# EAGLE board CONTROLBOARD-2.1 (EAGLE 7.6.0)
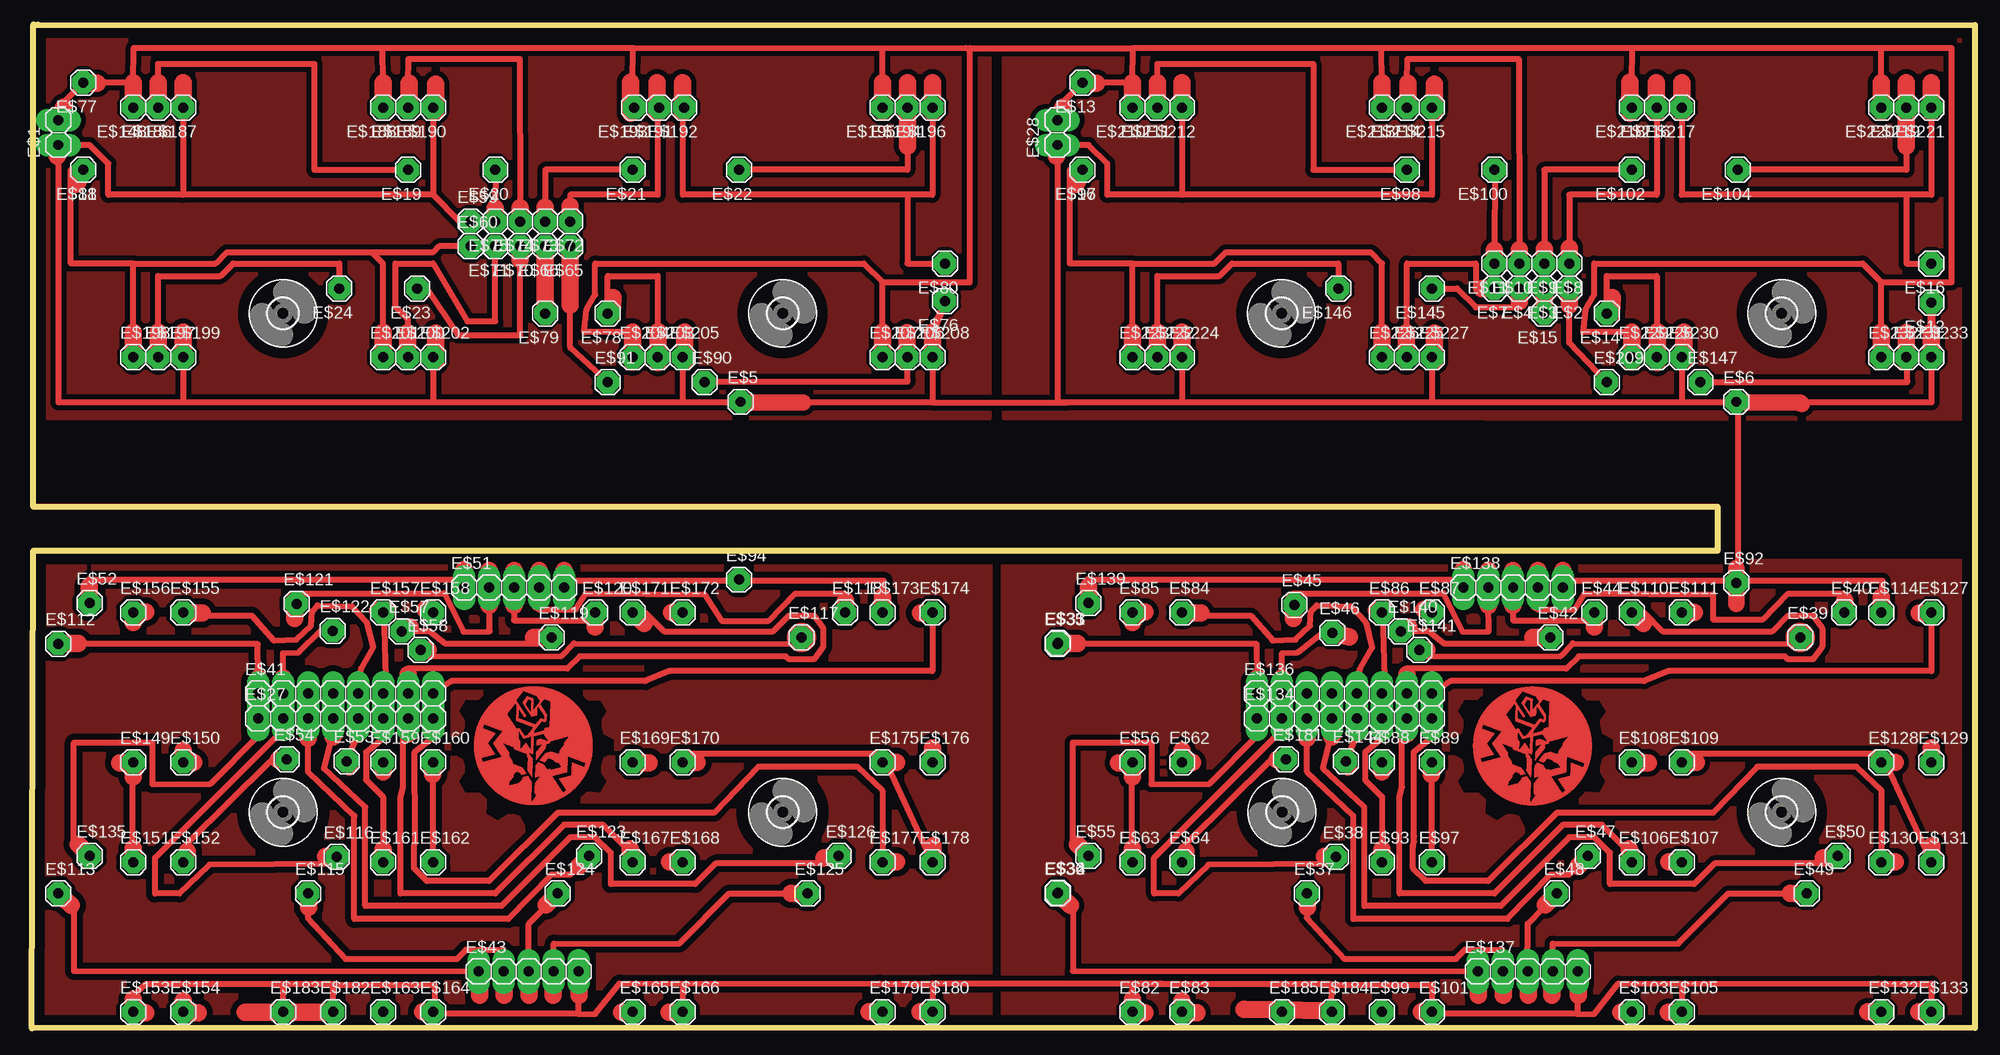
[diagram p0: board, top side]
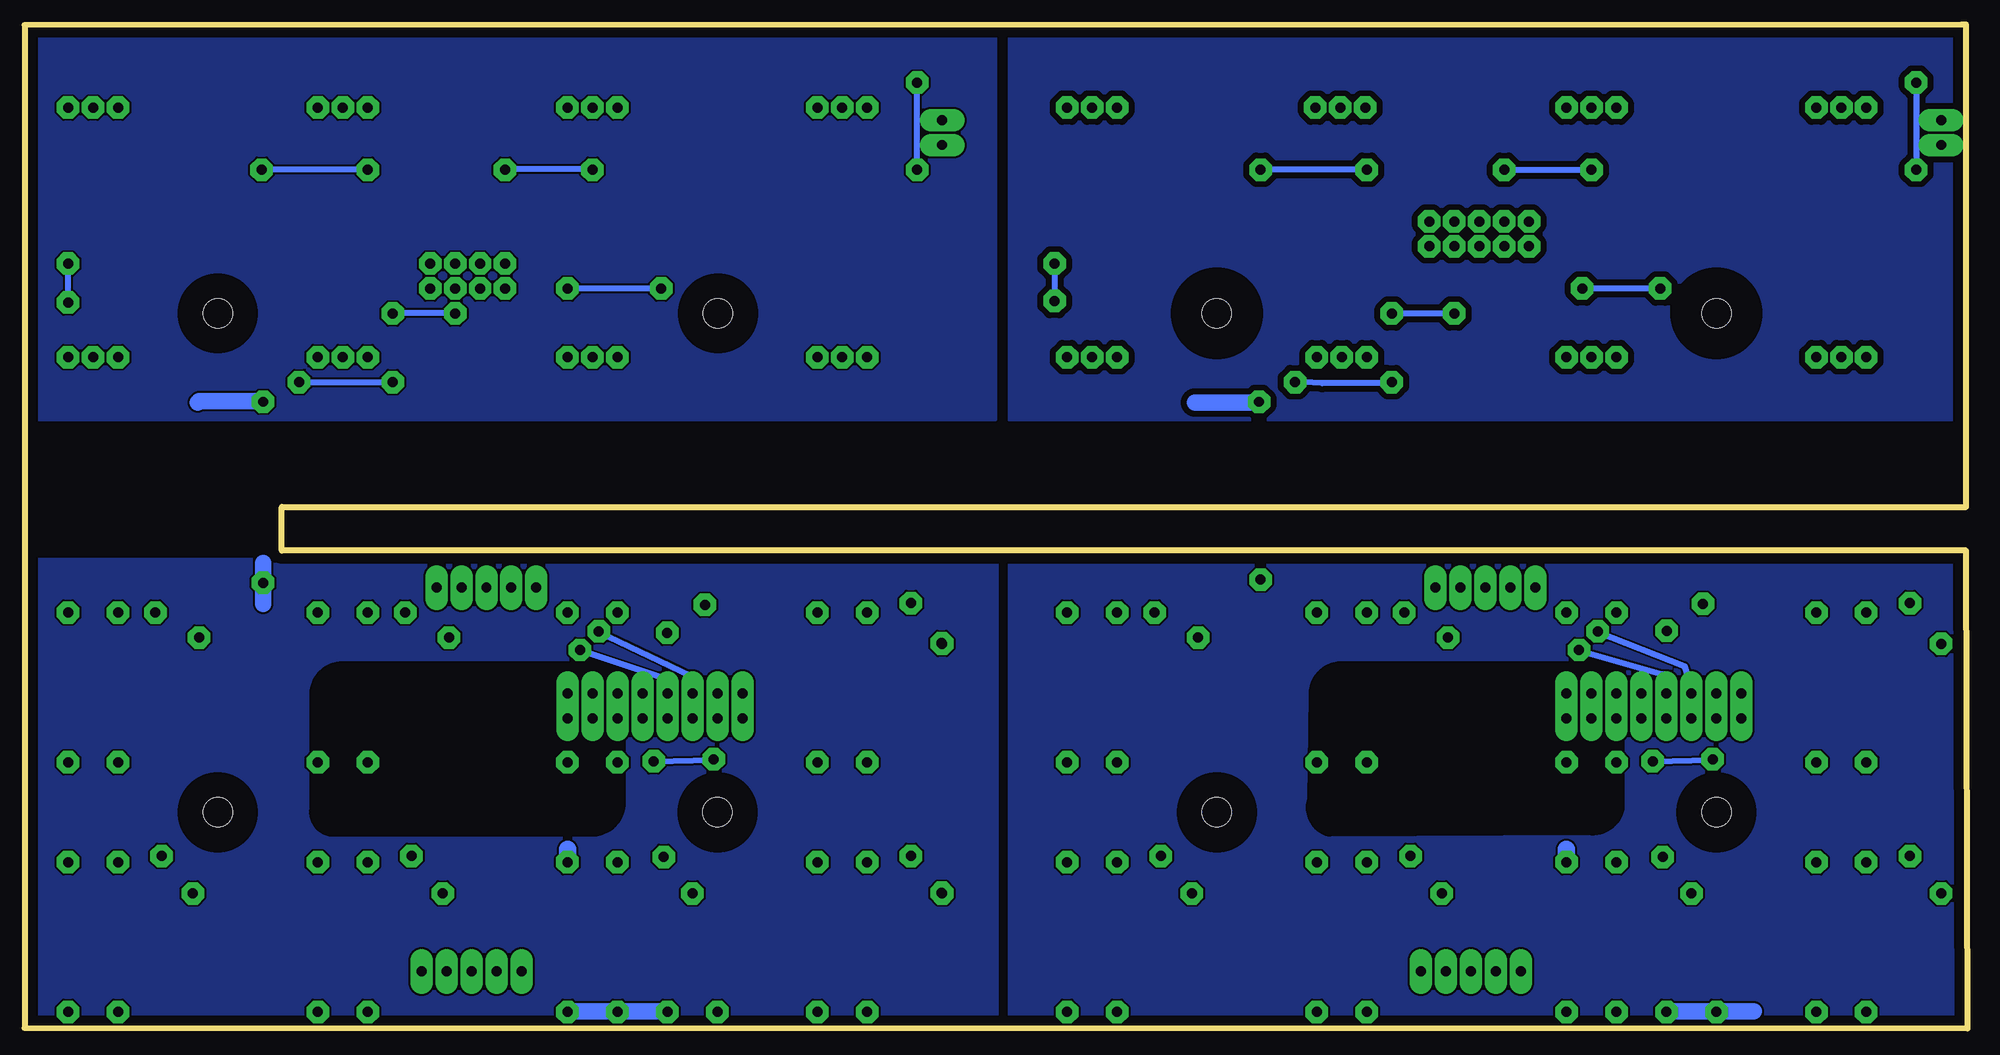
[diagram p1: board, bottom side, seen from below]

Size 197.61 x 102.11 mm. Coordinates in mm from the lower left corner, seen from the top.
Outline: 0.64,102.11 197.61,102.06 197.61,0.05 0,0 0.15,48.59 171.44,48.59 171.44,53.04 0.15,53.04 0.15,102.11 0.64,102.11
Copper layers (1*16): Top 0.035mm / dielectric 1.5mm / Bottom 0.035mm
Design rules "default *": minimum track width 10mil, minimum drill 40mil, track to track 8mil, track to pad 8mil, pad to pad 8mil, via to via 8mil, smd to smd 8mil, copper to edge 40mil, drill to drill 8mil, minimum pad ring 25mil, minimum via ring 8mil, stop-mask expansion 4mil, vias tented up to drill 0mil, thermal gap 10mil

## Footprints (pad centres in the part's own frame; a part is rotated, then mirrored left to right if it is on the bottom)
1X02 = drill 1.016 long: 1 -1.27,0; 2 1.27,0
1X01 = drill 1.016 octagon: 1 0,0
3,0 = hole 3: 0,0
1X08 = drill 1.016 long: 1 -8.89,0; 2 -6.35,0; 3 -3.81,0; 4 -1.27,0; 5 1.27,0; 6 3.81,0; 7 6.35,0; 8 8.89,0
1X05 = drill 1.016 long: 1 -5.08,0; 2 -2.54,0; 3 0,0; 4 2.54,0; 5 5.08,0

## Placement (x,y rotation side)
E$1  [1X02]  2.69,91.14 90 top
E$2  [1X01]  156.36,75.26 180 top
E$3  [1X01]  153.82,75.26 180 top
E$4  [1X01]  151.28,75.26 180 top
E$5  [1X01]  72.07,63.74 0 top
E$6  [1X01]  173.35,63.74 0 top
E$7  [1X01]  148.74,75.26 180 top
E$8  [1X01]  156.36,77.8 180 top
E$9  [1X01]  153.82,77.8 180 top
E$10  [1X01]  151.28,77.8 180 top
E$11  [1X01]  148.74,77.8 180 top
E$12  [1X01]  193.19,73.83 180 top
E$13  [1X01]  106.83,96.22 180 top
E$14  [1X01]  160.17,72.72 180 top
E$15  [1X01]  153.82,72.72 180 top
E$16  [1X01]  193.19,77.8 180 top
E$17  [1X01]  106.83,87.33 180 top
E$18  [1X01]  5.23,87.33 180 top
E$19  [1X01]  38.25,87.33 180 top
E$20  [1X01]  47.14,87.33 180 top
E$21  [1X01]  61.11,87.33 180 top
E$22  [1X01]  71.91,87.33 180 top
E$23  [1X01]  39.2,75.26 180 top
E$24  [1X01]  31.27,75.26 180 top
E$25  [3,0]  127.15,21.98 0 top
E$26  [3,0]  177.95,21.98 0 top
E$27  [1X08]  31.9,31.51 0 top
E$28  [1X02]  104.29,91.14 90 top
E$29  [3,0]  25.55,72.73 0 top
E$30  [3,0]  76.35,72.73 0 top
E$31  [1X01]  104.34,39.19 0 top
E$32  [1X01]  104.34,13.79 0 top
E$33  [1X01]  104.34,39.18 0 top
E$34  [1X01]  104.34,13.78 0 top
E$35  [1X01]  104.29,39.13 0 top
E$36  [1X01]  104.29,13.73 0 top
E$37  [1X01]  129.69,13.73 0 top
E$38  [1X01]  132.61,17.44 0 top
E$39  [1X01]  179.86,39.76 0 top
E$40  [1X01]  184.3,42.3 0 top
E$41  [1X08]  31.9,34.05 0 top
E$42  [1X01]  154.46,39.76 0 top
E$43  [1X05]  50.53,5.79 0 top
E$44  [1X01]  158.9,42.3 0 top
E$45  [1X01]  128.42,43.09 0 top
E$46  [1X01]  132.26,40.25 0 top
E$47  [1X01]  158.27,17.54 0 top
E$48  [1X01]  155.09,13.73 0 top
E$49  [1X01]  180.49,13.73 0 top
E$50  [1X01]  183.67,17.54 0 top
E$51  [1X05]  49.05,44.84 0 top
E$52  [1X01]  5.87,43.26 0 top
E$53  [1X01]  32.03,27.18 0 top
E$54  [1X01]  25.93,27.38 0 top
E$55  [1X01]  107.47,17.54 0 top
E$56  [1X01]  111.91,27.06 0 top
E$57  [1X01]  37.62,40.4 0 top
E$58  [1X01]  39.52,38.49 0 top
E$59  [1X01]  44.6,82.09 0 top
E$60  [1X01]  44.6,79.55 0 top
E$61  [3,0]  25.55,21.98 0 top
E$62  [1X01]  116.99,27.06 0 top
E$63  [1X01]  111.91,16.9 0 top
E$64  [1X01]  116.99,16.9 0 top
E$65  [1X01]  54.76,79.55 180 top
E$66  [1X01]  52.22,79.55 180 top
E$67  [3,0]  76.35,21.98 0 top
E$68  [3,0]  127.1,72.73 0 top
E$69  [3,0]  177.95,72.73 0 top
E$70  [1X01]  49.68,79.55 180 top
E$71  [1X01]  47.14,79.55 180 top
E$72  [1X01]  54.76,82.09 180 top
E$73  [1X01]  52.22,82.09 180 top
E$74  [1X01]  49.68,82.09 180 top
E$75  [1X01]  47.14,82.09 180 top
E$76  [1X01]  92.86,73.99 180 top
E$77  [1X01]  5.23,96.22 180 top
E$78  [1X01]  58.57,72.72 180 top
E$79  [1X01]  52.22,72.72 180 top
E$80  [1X01]  92.86,77.8 180 top
E$81  [1X01]  5.23,87.33 180 top
E$82  [1X01]  111.91,1.66 0 top
E$83  [1X01]  116.99,1.66 0 top
E$84  [1X01]  116.99,42.3 0 top
E$85  [1X01]  111.91,42.3 0 top
E$86  [1X01]  137.31,42.3 0 top
E$87  [1X01]  142.39,42.3 0 top
E$88  [1X01]  137.31,27.06 0 top
E$89  [1X01]  142.39,27.06 0 top
E$90  [1X01]  68.41,65.74 0 top
E$91  [1X01]  58.57,65.74 0 top
E$92  [1X01]  173.35,45.32 0 top
E$93  [1X01]  137.31,16.9 0 top
E$94  [1X01]  71.91,45.64 0 top
E$96  [1X01]  106.83,87.33 180 top
E$97  [1X01]  142.39,16.9 0 top
E$98  [1X01]  139.85,87.33 180 top
E$99  [1X01]  137.31,1.66 0 top
E$100  [1X01]  148.74,87.33 180 top
E$101  [1X01]  142.39,1.66 0 top
E$102  [1X01]  162.71,87.33 180 top
E$103  [1X01]  162.71,1.66 0 top
E$104  [1X01]  173.51,87.33 180 top
E$105  [1X01]  167.79,1.66 0 top
E$106  [1X01]  162.71,16.9 0 top
E$107  [1X01]  167.79,16.9 0 top
E$108  [1X01]  162.71,27.06 0 top
E$109  [1X01]  167.79,27.06 0 top
E$110  [1X01]  162.71,42.3 0 top
E$111  [1X01]  167.79,42.3 0 top
E$112  [1X01]  2.69,39.13 0 top
E$113  [1X01]  2.69,13.73 0 top
E$114  [1X01]  188.11,42.3 0 top
E$115  [1X01]  28.09,13.73 0 top
E$116  [1X01]  31.01,17.44 0 top
E$117  [1X01]  78.26,39.76 0 top
E$118  [1X01]  82.7,42.3 0 top
E$119  [1X01]  52.86,39.76 0 top
E$120  [1X01]  57.3,42.3 0 top
E$121  [1X01]  26.92,43.19 0 top
E$122  [1X01]  30.61,40.45 0 top
E$123  [1X01]  56.67,17.54 0 top
E$124  [1X01]  53.49,13.73 0 top
E$125  [1X01]  78.89,13.73 0 top
E$126  [1X01]  82.07,17.54 0 top
E$127  [1X01]  193.19,42.3 0 top
E$128  [1X01]  188.11,27.06 0 top
E$129  [1X01]  193.19,27.06 0 top
E$130  [1X01]  188.11,16.9 0 top
E$131  [1X01]  193.19,16.9 0 top
E$132  [1X01]  188.11,1.66 0 top
E$133  [1X01]  193.19,1.66 0 top
E$134  [1X08]  133.5,31.51 0 top
E$135  [1X01]  5.87,17.54 0 top
E$136  [1X08]  133.5,34.05 0 top
E$137  [1X05]  152.13,5.79 0 top
E$138  [1X05]  150.65,44.84 0 top
E$139  [1X01]  107.47,43.26 0 top
E$140  [1X01]  139.22,40.4 0 top
E$141  [1X01]  141.12,38.49 0 top
E$144  [1X01]  133.63,27.18 0 top
E$145  [1X01]  142.39,75.26 180 top
E$146  [1X01]  132.87,75.26 180 top
E$147  [1X01]  169.7,65.74 0 top
E$148  [1X01]  10.31,93.68 180 top
E$149  [1X01]  10.31,27.06 0 top
E$150  [1X01]  15.39,27.06 0 top  (not fitted)
E$151  [1X01]  10.31,16.9 0 top
E$152  [1X01]  15.39,16.9 0 top
E$153  [1X01]  10.31,1.66 0 top
E$154  [1X01]  15.39,1.66 0 top
E$155  [1X01]  15.39,42.3 0 top
E$156  [1X01]  10.31,42.3 0 top
E$157  [1X01]  35.71,42.3 0 top
E$158  [1X01]  40.79,42.3 0 top
E$159  [1X01]  35.71,27.06 0 top
E$160  [1X01]  40.79,27.06 0 top
E$161  [1X01]  35.71,16.9 0 top
E$162  [1X01]  40.79,16.9 0 top
E$163  [1X01]  35.71,1.66 0 top
E$164  [1X01]  40.79,1.66 0 top
E$165  [1X01]  61.11,1.66 0 top
E$166  [1X01]  66.19,1.66 0 top
E$167  [1X01]  61.11,16.9 0 top
E$168  [1X01]  66.19,16.9 0 top
E$169  [1X01]  61.11,27.06 0 top
E$170  [1X01]  66.19,27.06 0 top
E$171  [1X01]  61.11,42.3 0 top
E$172  [1X01]  66.19,42.3 0 top
E$173  [1X01]  86.51,42.3 0 top
E$174  [1X01]  91.59,42.3 0 top
E$175  [1X01]  86.51,27.06 0 top
E$176  [1X01]  91.59,27.06 0 top
E$177  [1X01]  86.51,16.9 0 top
E$178  [1X01]  91.59,16.9 0 top
E$179  [1X01]  86.51,1.66 0 top
E$180  [1X01]  91.59,1.66 0 top
E$181  [1X01]  127.53,27.38 0 top
E$182  [1X01]  30.63,1.66 0 top
E$183  [1X01]  25.55,1.66 0 top
E$184  [1X01]  132.23,1.66 0 top
E$185  [1X01]  127.15,1.66 0 top
E$186  [1X01]  12.85,93.68 180 top
E$187  [1X01]  15.39,93.68 180 top
E$188  [1X01]  35.71,93.68 180 top
E$189  [1X01]  38.25,93.68 180 top
E$190  [1X01]  40.79,93.68 180 top
E$191  [1X01]  63.81,93.68 180 top
E$192  [1X01]  66.35,93.68 180 top
E$193  [1X01]  61.27,93.68 180 top
E$194  [1X01]  89.05,93.68 180 top
E$195  [1X01]  86.51,93.68 180 top
E$196  [1X01]  91.59,93.68 180 top
E$197  [1X01]  12.85,68.28 0 top
E$198  [1X01]  10.31,68.28 0 top
E$199  [1X01]  15.39,68.28 0 top
E$200  [1X01]  38.25,68.28 0 top
E$201  [1X01]  35.71,68.28 0 top
E$202  [1X01]  40.79,68.28 0 top
E$203  [1X01]  63.65,68.28 0 top
E$204  [1X01]  61.11,68.28 0 top
E$205  [1X01]  66.19,68.28 0 top
E$206  [1X01]  89.05,68.28 0 top
E$207  [1X01]  86.51,68.28 0 top
E$208  [1X01]  91.59,68.28 0 top
E$209  [1X01]  160.17,65.74 0 top
E$210  [1X01]  111.91,93.68 180 top
E$211  [1X01]  114.45,93.68 180 top
E$212  [1X01]  116.99,93.68 180 top
E$213  [1X01]  137.31,93.68 180 top
E$214  [1X01]  139.85,93.68 180 top
E$215  [1X01]  142.39,93.68 180 top
E$216  [1X01]  165.25,93.68 180 top
E$217  [1X01]  167.79,93.68 180 top
E$218  [1X01]  162.71,93.68 180 top
E$219  [1X01]  190.65,93.68 180 top
E$220  [1X01]  188.11,93.68 180 top
E$221  [1X01]  193.19,93.68 180 top
E$222  [1X01]  114.45,68.28 0 top
E$223  [1X01]  111.91,68.28 0 top
E$224  [1X01]  116.99,68.28 0 top
E$225  [1X01]  139.85,68.28 0 top
E$226  [1X01]  137.31,68.28 0 top
E$227  [1X01]  142.39,68.28 0 top
E$228  [1X01]  165.25,68.28 0 top
E$229  [1X01]  162.71,68.28 0 top
E$230  [1X01]  167.79,68.28 0 top
E$231  [1X01]  190.65,68.28 0 top
E$232  [1X01]  188.11,68.28 0 top
E$233  [1X01]  193.19,68.28 0 top

## Library data of the parts
E$1-E$24 E$27 E$28 E$31-E$60 E$62-E$66 E$70-E$94 E$96-E$141 E$144-E$233 = pinhead
E$25 E$26 E$29 E$30 E$61 E$67-E$69 = holes

## Nets
S$9: E$54.1
S$15: E$136.8
S$16: E$110.1 E$136.7
S$17: E$130.1 E$134.8
S$19: E$64.1
S$25: E$41.8
S$26: E$41.7 E$171.1
S$27: E$27.8 E$177.1
S$28: E$152.1
S$30: E$41.5
S$36: E$161.1
S$37: E$27.2 E$116.1
S$38: E$166.1
S$39: E$27.7 E$167.1
S$40: E$123.1
S$41: E$71.1
S$42: E$60.1 E$81.1
S$43: E$57.1 E$119.1
S$45: E$52.1
S$46: E$135.1
S$47: E$113.1
S$48: E$1.2 E$77.1
S$55: E$72.1
S$57: E$74.1
S$58: E$78.1
S$60: E$13.1 E$28.2
S$61: E$2.1
S$63: E$4.1
S$65: E$7.1
S$66: E$12.1
S$76: E$136.5
S$82: E$93.1
S$83: E$38.1 E$134.2
S$84: E$105.1
S$85: E$106.1 E$134.7
S$86: E$47.1
S$90: E$9.1
S$91: E$42.1 E$140.1
S$93: E$139.1
S$94: E$55.1
S$95: E$36.1
S$101: E$8.1
S$102: E$11.1
S$110: E$10.1
S$167: E$76.1
S$168: E$14.1
S$237: E$53.1
S$244: E$209.1
S$280: E$80.1
S$281: E$75.1
S$283: E$73.1
S$285: E$70.1
S$287: E$65.1
S$288: E$91.1
S$289: E$66.1 E$79.1
S$293: E$17.1
S$295: E$16.1
S$296: E$3.1 E$15.1
S$298: E$181.1
S$299: E$144.1

## Tracks (layer width: path | path; a pad name or v marks a point on that pad's centre or on a via)
S$1
  Top 1.778: 46.51,43 46.51,46.56
S$2
  Top 0.61: 5.79,45.68 43.95,45.68 43.95,45.62
S$3
  Top 0.61: 26.88,44.22 41.97,44.22 41.97,44.25 43.89,40.35 46.57,40.38 46.54,43.15
S$4
  Top 0.61: 33.17,30.02 33.17,31.51
  Top 1.778: 33.12,31.5 33.17,30.02
S$5
  Top 0.61: 32.79,21.64 28.09,26.11 28.09,28.78
S$6
  Bottom 0.61: 37.62,40.34 28.8,36.86 28.09,34.62
S$7
  Bottom 0.61: 39.52,38.46 30.99,36.02 30.73,34.39
S$8
  Top 0.61: 28.09,31.57 28.09,31.5
  Top 1.778: 28.09,31.5 28.09,29.52
S$9
  Top 0.61: E$54.1 24.28,27.13
S$10
  Bottom 0.61: 32.06,27.16 26.03,27.32
S$11
  Top 0.813: 183.67,17.54 183.67,16.9
S$12
  Top 0.61: 55.78,1.47 41.05,1.47
S$13
  Top 1.778: 45.52,5.79 45.52,3.38
S$14
  Top 1.778: 50.6,5.79 50.6,3.38
S$15
  Top 0.61: 193.19,41.99 193.19,36.33 166.47,36.33 163.98,35.32 144.3,35.32 E$136.8
S$16
  Top 0.61: E$110.1 163.98,42.3 165.89,40.4 177,40.4 178.59,41.99 181.13,41.99 182.08,40.72 182.08,38.81 181.13,37.54 178.59,37.54 178.27,37.86 157.31,37.86 156.05,36.59 139.85,36.59 139.85,36.02 E$136.7
  Top 1.778: E$136.7 139.85,36.02
S$17
  Top 0.61: 142.39,30.99 142.39,29.6 140.55,28.12 140.56,19.53 140.56,18.97 140.46,18.49 140.46,16.29 141.76,15 148.11,15 155.14,21.97 171.01,21.97 175.48,26.62 185.57,26.62 188.11,24.21 E$130.1 | E$134.8
  Top 1.778: E$134.8 142.39,30.99 | E$130.1 189.53,16.92
S$18
  Top 0.61: 134.77,30.02 134.77,31.51
  Top 1.778: 134.72,31.5 134.77,30.02
S$19
  Top 0.61: E$64.1 116.99,18.36 117.63,19 125.76,27.06
S$20
  Top 1.778: 142.39,16.87 142.39,16.9
S$21
  Top 1.778: 142.65,70.71 142.65,67.89
S$22
  Top 1.778: 139.81,70.76 139.81,67.89
S$23
  Top 0.813: 82.07,17.54 82.07,16.9
S$24
  Top 1.778: 165.32,70.87 165.32,67.74
S$25
  Top 0.61: 91.59,41.99 91.59,36.33 64.87,36.33 62.38,35.32 42.7,35.32 E$41.8
S$26
  Top 0.61: E$171.1 62.38,42.3 64.29,40.4 75.4,40.4 76.99,41.99 79.53,41.99 80.48,40.72 80.48,38.81 79.53,37.54 76.99,37.54 76.67,37.86 55.72,37.86 54.44,36.59 38.25,36.59 38.25,36.02 E$41.7
  Top 1.778: E$41.7 38.25,36.02
S$27
  Top 0.61: 40.79,30.99 40.79,29.6 38.95,28.12 38.96,19.53 38.96,18.97 38.86,18.49 38.86,16.29 40.16,15 46.51,15 53.54,21.97 69.41,21.97 73.88,26.62 83.97,26.62 86.51,24.21 E$177.1 | E$27.8
  Top 1.778: E$27.8 40.79,30.99 | E$177.1 87.93,16.92
S$28
  Top 0.61: E$152.1 15.39,18.36 16.03,19 24.16,27.06
S$29
  Top 0.61: 40.79,17.49 40.79,27.38
S$30
  Top 0.61: E$41.5 33.49,36.59
S$31
  Top 0.61: 86.19,4.55 91.59,4.55 91.59,1.98
S$32
  Top 0.61: 40.86,1.98 40.86,1.95
S$33
  Top 0.61: 33.49,36.59 34.7,38.75 34.06,41.29 32.54,42.94 29.05,43.04 29.05,42.96 28.5,42.42 28.4,40.95 26.92,39.55 24.6,39.45 22.38,41.99 15.39,41.99
S$34
  Top 0.406: 41.11,42.62 41.11,41.67
S$35
  Top 0.61: 35.78,42.3 36.03,34.05
S$36
  Top 0.61: 35.71,31.51 35.67,29.46 33.99,28.09 34,25.29 35.71,23.57 35.71,18.19 E$161.1
  Top 1.778: 35.76,16.92 35.71,18.19
S$37
  Top 0.61: E$116.1 31.27,16.71 18.06,16.65 15.01,13.73 12.53,13.73 12.53,17.35 25.55,30.37 25.55,30.43 | E$27.2
  Top 1.778: E$27.2 25.55,30.43
S$38
  Top 0.61: 66.19,4.5 E$166.1
S$39
  Top 0.61: E$167.1 60.93,17.86 58.08,20.71 54.13,20.71 47.14,13.73 37.5,13.73 37.5,23.57 37.74,24.52 37.74,29.54 38.25,29.97 | E$27.7
  Top 1.778: E$27.7 38.25,29.97
S$40
  Top 0.61: E$123.1 54.76,15.63 52.86,15.63 48.47,11.13 32.8,11.14 32.8,21.56
S$41
  Top 0.61: 44.28,71.93 47.14,71.93 E$71.1
S$42
  Top 0.61: E$60.1 41.43,79.55 40.79,78.91 34.6,78.91 | E$81.1 3.96,87.33 3.96,77.8 10.31,77.8 | 10.31,70.82 10.31,77.8 | 35.71,70.82 35.71,77.8 34.6,78.91 | 34.6,78.91 34.57,78.94 19.84,78.94 18.69,77.8 10.31,77.8
  Top 1.778: 35.71,70.82 35.71,67.95 | 10.31,70.82 10.31,67.89
S$43
  Top 0.61: E$57.1 40.47,40.4 42.06,39.13 51.27,39.13 E$119.1
S$44
  Top 0.61: 82.07,16.78 69.56,16.78 67.46,14.68 58.89,14.68 58.89,17.86 57.3,19.44 54.76,19.44 47.78,12.46 33.92,12.46 33.92,22.53
S$45
  Top 0.406: 5.87,45.16 E$52.1
S$46
  Top 0.61: 4.28,19.13 E$135.1
S$47
  Top 0.61: 4.28,12.14 E$113.1
S$48
  Top 0.61: 86.51,75.9 84.61,77.8 57.3,77.8 57.3,74.63 56.44,73.15 56.18,70.82 61.11,70.82 | 86.51,75.9 95.4,75.9 95.4,99.75 86.51,99.7 | 86.51,70.82 86.51,75.9 | 35.66,99.75 10.36,99.75 10.31,96.22 E$77.1 2.69,93.68 2.69,92.51 E$1.2 | 35.66,99.75 61.16,99.75 | 61.16,99.75 86.51,99.7 | 86.51,96.22 86.51,99.7 | 61.11,96.22 61.16,99.75 | 35.71,96.22 35.66,99.75
  Top 1.778: 86.51,96.22 86.51,93.24 | 35.71,96.22 35.71,93.45 | 10.31,96.22 10.31,93.75 | 86.51,70.82 86.51,67.84 | 61.11,70.82 61.11,67.79 | 2.69,92.51 3.25,93.73
S$49
  Top 0.61: 89.05,65.75 68.41,65.75
S$50
  Top 0.61: 12.85,70.82 12.85,76.53 19.2,76.53 20.47,77.8 31.27,77.8 31.27,75.36
  Top 1.778: 12.85,70.82 12.85,67.89
S$51
  Top 0.61: 38.25,70.82 38.25,72.09 36.98,73.36 36.98,77.8 40.79,77.8 44.28,71.93
S$52
  Top 1.778: 168,70.82 168,67.84
S$53
  Top 0.406: 40.79,96.22 40.79,94.31
  Top 0.61: 40.79,84.79 15.39,84.79 | 15.39,84.79 7.77,84.79 7.77,87.96 5.87,89.87 2.69,89.87 2.69,63.68 | 40.79,94.31 40.79,84.79 | 15.39,93.8 15.39,84.79 | 44.44,82.09 43.49,82.09 40.79,84.79
  Top 1.778: 15.39,96.22 15.39,93.8
S$54
  Top 0.61: 89.05,89.74 89.05,87.33 71.91,87.33
  Top 1.778: 89.05,96.22 89.05,89.74
S$55
  Top 0.406: 63.65,96.22 63.65,94.31
  Top 0.61: 63.65,94.31 63.65,84.79 54.76,84.79 54.76,83.64 E$72.1
  Top 1.778: 54.76,82.06 54.76,83.64
S$56
  Top 0.61: 12.85,96.22 12.85,98.12 28.73,98.12 28.73,87.33 38.25,87.33
  Top 1.778: 12.85,96.22 12.85,93.8
S$57
  Top 0.61: 38.25,96.22 38.3,98.63 49.63,98.63 49.68,83.48 E$74.1
  Top 1.778: 49.68,82.06 49.68,83.48
S$58
  Top 0.61: E$78.1 58.57,76.53 63.65,76.53 63.65,70.82
S$59
  pour Top (isolate 0.508): 97.31,62.13 0.79,62.13 0.73,101.38 97.31,101.3
S$60
  Top 0.61: 188.11,75.9 186.21,77.8 158.9,77.8 158.9,74.63 158.04,73.15 157.78,70.82 162.71,70.82 | 188.11,75.9 195.26,75.9 195.26,99.74 188.11,99.75 | 188.11,70.82 188.11,75.9 | 137.26,99.75 111.96,99.75 111.91,96.22 E$13.1 104.29,93.68 104.29,92.51 E$28.2 | 137.26,99.75 162.76,99.75 | 162.76,99.75 188.11,99.75 | 188.11,96.22 188.11,99.75 | 162.71,96.22 162.76,99.75 | 137.31,96.22 137.26,99.75
  Top 1.778: 188.11,96.22 188.11,93.24 | 137.31,96.22 137.31,93.45 | 111.91,96.22 111.91,93.75 | 188.11,70.82 188.11,67.84 | 162.71,70.82 162.71,67.79 | 104.29,92.51 104.85,93.73
S$61
  Top 0.61: 156.36,75.18 E$2.1 | 156.36,69.84 156.36,73.56
  Top 1.778: 156.36,75.18 156.36,73.56
S$62
  Top 0.61: 190.68,65.72 169.73,65.72
S$63
  Top 0.61: E$4.1 151.28,73.91 151.28,73.36 146.84,73.36 144.93,75.26 142.39,75.26
  Top 1.778: 151.28,75.34 151.28,73.91
S$64
  Top 0.61: 114.45,70.82 114.45,76.53 120.8,76.53 122.07,77.8 132.87,77.8 132.87,75.36
  Top 1.778: 114.45,70.82 114.45,67.89
S$65
  Top 0.61: 139.85,70.82 139.85,77.8 146.84,77.8 146.84,75.26 E$7.1
S$66
  Top 0.406: 167.79,70.82 167.79,68.91
  Top 0.61: 193.19,67.89 193.19,63.68 167.79,63.68 | 167.79,63.68 142.39,63.68 | 142.39,63.68 116.99,63.68 | 116.99,63.68 104.36,63.68 | 167.79,68.91 167.79,63.68 | 142.39,68.91 142.39,63.68 | 116.99,67.95 116.99,63.68
  Top 0.813: E$12.1 193.19,70.82
  Top 1.778: 193.19,70.82 193.19,67.89 | 116.99,70.82 116.99,67.95
S$67
  pour Top (isolate 0.61): 0.79,47.29 97.31,47.29 97.31,1.03 0.79,0.88
S$68
  Bottom 1.778: 142.39,16.9 142.39,18.19
S$69
  Top 1.778: 162.51,96.27 162.51,93.09
S$70
  Top 1.27: 91.59,96.22 91.59,94.31
S$71
  Top 1.778: 165.19,96.22 165.19,93.09
S$72
  Top 1.778: 139.97,96.16 139.97,93.45
S$73
  Top 1.778: 142.65,96.06 142.65,93.35
S$74
  pour Top (isolate 0.508): 98.96,47.38 196.37,47.38 196.79,0.87 98.96,1.03
S$75
  Top 0.61: 142.39,17.49 142.39,27.38
S$76
  Top 0.61: E$136.5 135.09,36.59
S$77
  Top 0.61: 187.8,4.55 193.19,4.55 193.19,1.98
S$78
  Bottom 1.676: 132.23,1.76 142.39,1.76
S$79
  Top 0.61: 135.09,36.59 136.3,38.75 135.66,41.29 134.14,42.94 130.64,43.04 130.64,42.96 130.1,42.42 130,40.95 128.52,39.55 126.2,39.45 123.98,41.99 116.99,41.99
S$80
  Top 0.406: 142.71,42.62 142.71,41.67
S$81
  Top 0.61: 137.38,42.3 137.63,34.05
S$82
  Top 0.61: 137.31,31.51 137.27,29.46 135.59,28.09 135.6,25.29 137.31,23.57 137.31,18.19 E$93.1
  Top 1.778: 137.36,16.92 137.31,18.19
S$83
  Top 0.61: E$38.1 132.87,16.71 119.66,16.65 116.61,13.73 114.13,13.73 114.13,17.35 127.15,30.37 127.15,30.43 | E$134.2
  Top 1.778: E$134.2 127.15,30.43
S$84
  Top 0.61: 167.79,4.5 E$105.1
S$85
  Top 0.61: E$106.1 162.53,17.86 159.68,20.71 155.73,20.71 148.74,13.73 139.1,13.73 139.1,23.57 139.34,24.52 139.34,29.54 139.85,29.97 | E$134.7
  Top 1.778: E$134.7 139.85,29.97
S$86
  Top 0.61: E$47.1 156.36,15.63 154.46,15.63 150.07,11.13 134.4,11.14 134.4,21.56
S$87
  Top 0.61: 30.63,4.46 40.95,4.46 40.95,1.76 40.63,1.44
S$88
  Top 0.61: 131.92,4.46 142.39,4.46 142.39,1.6
S$89
  Top 0.406: 142.39,96.22 142.39,94.31
  Top 0.61: 116.99,84.79 142.39,84.79 142.39,94.31 | 116.99,84.79 109.37,84.79 109.37,87.96 107.47,89.87 104.29,89.87 104.29,63.68 | 116.99,93.8 116.99,84.79
  Top 1.778: 116.99,96.22 116.99,93.8
S$90
  Top 0.61: 162.71,87.33 153.82,87.33 153.82,79.25 E$9.1
  Top 1.778: 153.82,77.78 153.82,79.25
S$91
  Top 0.61: E$140.1 142.07,40.4 143.66,39.13 152.87,39.13 E$42.1
S$92
  Top 0.61: 183.67,16.78 171.16,16.78 169.06,14.68 160.49,14.68 160.49,17.86 158.9,19.44 156.36,19.44 149.38,12.46 135.52,12.46 135.52,22.53
S$93
  Top 0.406: 107.47,45.16 E$139.1
S$94
  Top 0.61: 105.88,19.13 E$55.1
S$95
  Top 0.61: 105.88,12.14 E$36.1
S$96
  Top 0.61: 172.87,63.83 173.51,63.83 173.51,45.42
S$97
  Top 0.61: 25.54,35.8 25.54,38.18 27.16,38.24 29.41,40.47 31.3,40.47
S$98
  Top 0.61: 23.04,35.74 22.98,39.1 2.99,39.13
S$99
  Top 1.778: 155.73,44.27 155.73,46.56
S$100
  Top 0.61: 190.65,89.74 190.65,87.33 173.51,87.33
  Top 1.778: 190.65,96.22 190.65,89.74
S$101
  Top 0.406: 165.25,96.22 165.25,94.31
  Top 0.61: 165.25,94.31 165.25,84.79 156.36,84.79 156.36,79.35 E$8.1
  Top 1.778: 156.36,77.78 156.36,79.35
S$102
  Top 0.61: 148.74,77.88 E$11.1 | 148.79,87.35 148.74,79.15
  Top 1.778: 148.74,77.88 148.74,79.15
S$103
  Top 0.61: 114.45,96.22 114.45,98.12 130.33,98.12 130.33,87.33 139.85,87.33
  Top 1.778: 114.45,96.22 114.45,93.8
S$104
  Top 1.778: 51.59,43.26 51.59,46.56
S$105
  Top 1.778: 49.05,43 49.05,46.56
S$106
  Top 1.778: 43.97,44.09 43.97,46.69
S$107
  Top 1.778: 54.13,44.27 54.13,46.56
S$108
  Top 1.676: 173.35,63.67 179.86,63.67 180.02,63.51
S$109
  Top 1.676: 72.07,63.67 78.42,63.67
S$110
  Top 0.61: 139.85,96.22 139.9,98.63 151.23,98.63 151.28,79.2 E$10.1
  Top 1.778: 151.28,77.78 151.28,79.2
S$111
  Top 1.778: 25.55,34.09 25.55,35.66
S$112
  pour Top (isolate 0.508): 196.47,62.03 98.96,62.13 98.99,101.3 196.88,101.35
S$113
  Top 1.778: 23.06,34.04 23.06,35.66
S$114
  Top 1.778: 33.17,34.04 33.48,34.9
S$115
  Top 1.778: 35.71,34.04 35.71,35.31
S$116
  Top 1.778: 40.84,34.04 41.1,34.81
S$117
  Top 1.778: 23.01,31.5 23.01,30.38
S$118
  Top 1.778: 35.71,31.45 35.71,30.12
S$119
  Top 1.778: 15.44,16.92 15.8,17.98
S$120
  Top 1.778: 10.31,16.92 10.31,18.29
S$121
  Top 1.778: 2.69,13.72 4.01,12.5
S$122
  Top 1.778: 5.89,17.48 4.72,18.69
S$123
  Top 1.778: 10.36,1.68 10.31,2.95
S$124
  Top 1.778: 15.39,1.63 15.39,2.79
S$125
  Top 1.778: 10.31,27.03 10.31,27 | 10.31,27 10.31,25.6 | 10.31,27 8.92,27
S$126
  Top 1.778: 15.39,27.03 15.39,28.3
S$127
  Top 1.778: 2.69,39.17 4.72,39.17
S$128
  Top 1.778: 5.89,43.23 5.84,44.96
S$129
  Top 1.778: 10.31,42.27 10.31,41.3
S$130
  Top 1.778: 15.39,42.27 17.32,42.27
S$131
  Top 1.778: 26.72,41.71 26.77,43.64
S$132
  Top 1.676: 173.35,46.84 173.35,43.19
S$133
  Top 1.778: 39.57,38.51 40.28,38.51
S$134
  Top 1.778: 37.64,40.39 38.46,40.84
S$135
  Top 1.778: 35.15,42.52 36.17,42.52
S$136
  Top 1.778: 40.79,42.62 39.98,42.62
S$137
  Top 1.778: 35.71,27.08 35.71,26.11
S$138
  Top 1.778: 40.74,27.03 40.74,25.86
S$139
  Top 1.778: 31.29,17.48 29.87,17.48
S$140
  Top 1.778: 28.14,13.72 28.14,12.29
S$141
  Top 1.778: 153.19,43.26 153.19,46.56
S$142
  Top 1.778: 40.79,1.68 39.73,1.68
S$143
  Top 1.778: 53.44,13.72 52.32,12.55
S$144
  Top 1.778: 56.69,17.53 55.63,16.46
S$145
  Top 1.778: 61.16,16.97 60.86,18.24
S$146
  Top 1.778: 66.24,16.92 64.87,16.92
S$147
  Top 1.778: 61.11,1.68 59.99,1.63
S$148
  Top 1.778: 66.14,1.63 64.82,1.63
S$149
  Top 1.778: 61.16,27.03 62.79,27.03
S$150
  Top 1.778: 66.24,27.08 67.67,27.08
S$151
  Top 1.778: 52.88,39.78 51.05,39.78
S$152
  Top 1.778: 57.3,42.37 57.3,40.84
S$153
  Top 1.778: 61.11,42.32 62.28,41.2
S$154
  Top 1.778: 66.14,42.32 65.08,42.32
S$155
  Top 1.778: 82.75,42.32 82.75,43.54
S$156
  Top 1.778: 86.51,42.27 86.51,43.89
S$157
  Top 1.778: 91.64,42.27 90.37,42.27
S$158
  Top 1.778: 86.46,27.08 87.93,27.08
S$159
  Top 1.778: 91.59,26.98 91.59,28.55
S$160
  Top 1.778: 91.59,1.68 90.32,1.68
S$161
  Top 1.778: 86.51,1.68 85.14,1.68
S$162
  Top 1.778: 5.23,96.16 6.65,96.16
S$163
  Top 1.778: 2.64,89.76 2.59,88.7
S$164
  Top 1.778: 5.18,87.22 4.57,85.85
S$165
  Bottom 1.676: 173.35,47.32 173.35,43.19
S$166
  Top 1.778: 59.03,72.7 59.13,74.32
S$167
  Top 0.406: 66.19,70.82 66.19,68.91
  Top 0.61: 91.59,67.89 91.59,63.68 | 91.59,63.68 66.19,63.68 | 66.19,63.68 40.79,63.68 | 40.79,63.68 15.39,63.68 | 15.39,63.68 2.76,63.68 | 66.19,68.91 66.19,63.68 | 40.79,68.91 40.79,63.68 | 15.39,67.95 15.39,63.68 | 91.59,63.68 105.31,63.68
  Top 0.813: E$76.1 91.59,70.82
  Top 1.778: 91.59,70.82 91.59,67.89 | 15.39,70.82 15.39,67.95
S$168
  Top 0.61: E$14.1 160.17,76.53 165.25,76.53 165.25,70.82
S$169
  Top 1.778: 91.64,16.92 91.64,18.54
S$170
  Top 1.27: 193.19,96.22 193.19,94.31
S$171
  Top 1.778: 106.83,96.16 108.25,96.16
S$172
  Top 1.778: 104.24,89.76 104.19,88.7
S$173
  Top 1.778: 106.78,87.22 106.17,85.85
S$174
  Top 1.778: 148.79,75.24 147.47,75.24
S$175
  Top 1.778: 160.63,72.7 160.73,74.32
S$176
  Top 0.61: 10.27,18.46 10.27,25.26
S$177
  Top 1.778: 150.65,43 150.65,46.56
S$178
  Top 1.778: 145.57,44.09 145.57,46.69
S$179
  Top 1.778: 148.11,43 148.11,46.56
S$180
  Top 0.61: 129.69,31.57 129.69,31.5
  Top 1.778: 129.69,31.5 129.69,29.52
S$181
  Top 0.61: 157.38,1.47 142.65,1.47
S$182
  Top 1.778: 147.12,5.79 147.12,3.38
S$183
  Top 1.778: 157.28,5.79 157.28,3.38
S$184
  Top 1.778: 154.61,5.79 154.61,3.38
S$185
  Top 1.778: 149.66,5.79 149.66,3.38
S$186
  Top 1.778: 152.2,5.79 152.2,3.38
S$187
  Top 0.61: 4.27,19.16 4.27,29.07 12.25,29.07 12.25,24.83 18.17,24.89 23.01,29.77
S$188
  Bottom 1.676: 173.35,63.83 179.86,63.83 180.02,63.67
S$189
  Bottom 1.676: 72.07,63.67 78.57,63.67
S$190
  Top 0.61: 4.27,12.21 4.27,5.84 45.38,5.78
S$191
  Top 1.778: 127.15,34.09 127.15,35.66
S$192
  Top 1.778: 124.66,34.04 124.66,35.66
S$193
  Top 1.778: 134.77,34.04 135.08,34.9
S$194
  Top 1.778: 137.31,34.04 137.31,35.31
S$195
  Top 1.778: 142.44,34.04 142.7,34.81
S$196
  Top 1.778: 124.61,31.5 124.61,30.38
S$197
  Top 1.778: 137.31,31.45 137.31,30.12
S$198
  Top 1.778: 117.04,16.92 117.4,17.98
S$199
  Top 1.778: 111.91,16.92 111.91,18.29
S$200
  Top 1.778: 104.29,13.72 105.61,12.5
S$201
  Top 1.778: 107.49,17.48 106.32,18.69
S$202
  Top 1.778: 111.96,1.68 111.91,2.95
S$203
  Top 1.778: 116.99,1.63 116.99,2.79
S$204
  Top 1.778: 111.91,27.03 111.91,27 | 111.91,27 111.91,25.6 | 111.91,27 110.52,27
S$205
  Top 1.778: 116.99,27.03 116.99,28.3
S$206
  Top 1.778: 104.29,39.17 106.32,39.17
S$207
  Top 1.778: 107.49,43.23 107.44,44.96
S$208
  Top 1.778: 111.91,42.27 111.91,41.3
S$209
  cutout Top: 45.57,24.13 44.17,24.1 43.59,25.11 44.32,26.23 43.98,27.45 42.79,28.12 42.79,29.31 43.95,29.89 44.32,31.17 43.59,32.27 44.2,33.3 45.42,33.24 46.45,34.22 46.39,35.47 47.4,36.05 48.4,35.38 49.87,35.77 50.38,36.84 51.54,36.84 52.06,35.77 53.52,35.38 54.53,36.02 55.53,35.41 55.47,34.31 56.54,33.18 57.73,33.21 58.31,32.24 57.67,31.26 58,29.83 59.07,29.31 59.07,28.12 58,27.6 57.61,26.2 58.28,25.14 57.7,24.13 56.42,24.19 55.47,23.28 55.53,21.94 54.5,21.36 53.43,22.06 52.18,21.78 51.54,20.53 50.35,20.53 49.77,21.72 48.59,22.09 47.4,21.33 46.36,21.94 46.45,23.28
S$210
  Top 1.778: 116.99,42.27 118.92,42.27
S$211
  Top 1.778: 128.32,41.71 128.37,43.64
S$212
  Top 1.778: 134.01,39.83 132.44,40.18
S$213
  Top 1.778: 141.17,38.51 141.88,38.51
S$214
  Top 1.778: 139.24,40.39 140.06,40.84
S$215
  Top 1.778: 136.75,42.52 137.77,42.52
S$216
  Top 1.778: 142.39,42.62 141.58,42.62
S$217
  Top 1.778: 137.31,27.08 137.31,26.11
S$218
  Top 1.778: 142.34,27.03 142.34,25.86
S$219
  Top 1.778: 132.89,17.48 131.47,17.48
S$220
  Top 1.778: 129.74,13.72 129.74,12.29
S$222
  Top 1.778: 132.18,1.78 123.28,1.94
S$223
  Top 1.778: 142.39,1.68 141.33,1.68
S$224
  Top 1.778: 155.04,13.72 153.92,12.55
S$225
  Top 1.778: 158.29,17.53 157.23,16.46
S$226
  Top 1.778: 162.76,16.97 162.46,18.24
S$227
  Top 1.778: 167.84,16.92 166.47,16.92
S$228
  Top 1.778: 162.71,1.68 161.59,1.63
S$229
  Top 1.778: 167.74,1.63 166.42,1.63
S$230
  Top 1.778: 162.76,27.03 164.39,27.03
S$231
  Top 1.778: 167.84,27.08 169.27,27.08
S$232
  Top 1.778: 154.48,39.78 152.65,39.78
S$233
  Top 1.778: 158.9,42.37 158.9,40.84
S$234
  Top 1.778: 162.71,42.32 163.88,41.2
S$235
  Top 1.778: 167.74,42.32 169.06,42.32
S$236
  Top 0.61: 33.86,22.58 29.72,26.44 30.38,29.03 30.63,29.67 | 30.63,31.57 30.63,31.5
  Top 1.778: 30.63,31.5 30.63,29.67
S$237
  Top 0.61: E$53.1 33.05,29.54
S$238
  Top 1.778: 184.35,42.32 184.35,43.54
S$239
  Top 1.778: 188.11,42.27 188.11,43.89
S$240
  Top 1.778: 193.24,42.27 191.97,42.27
S$241
  Top 1.778: 188.06,27.08 189.53,27.08
S$242
  Top 1.778: 78.99,13.67 77.22,13.72
S$243
  Top 1.778: 82.09,17.42 80.57,17.32
S$244
  Top 0.61: 156.36,69.74 E$209.1
S$245
  Top 1.778: 193.19,26.98 193.19,28.55
S$246
  Top 1.778: 193.19,1.68 191.92,1.68
S$247
  Top 1.778: 188.11,1.68 186.74,1.68
S$248
  Top 1.778: 10.31,1.6 11.58,1.6
S$249
  Top 1.778: 15.39,1.6 16.92,1.6
S$250
  Top 1.778: 10.31,42.37 11.58,42.37
S$251
  Top 1.778: 193.24,16.92 193.24,18.54
S$252
  Top 1.778: 180.59,13.67 178.82,13.72
S$253
  Top 1.778: 15.44,27.08 16.46,27.08
S$254
  Top 1.778: 26.11,27.28 25.04,27.33
S$255
  Top 1.778: 32.26,27.38 32.26,26.62
S$256
  Top 1.778: 183.69,17.42 182.17,17.32
S$257
  Top 1.778: 111.91,1.6 113.18,1.6
S$258
  Top 1.778: 63.59,96.22 63.59,93.09
S$259
  Top 1.778: 60.91,96.27 60.91,93.09
S$260
  Top 1.778: 38.37,96.16 38.37,93.45
S$261
  Top 1.778: 41.05,96.06 41.05,93.35
S$262
  Top 1.778: 41.05,70.71 41.05,67.89
S$263
  Top 1.778: 38.21,70.76 38.21,67.89
S$264
  Top 1.778: 66.4,70.82 66.4,67.84
S$265
  Top 1.778: 63.72,70.87 63.72,67.74
S$267
  Top 1.778: 30.58,1.63 21.68,1.63
S$268
  Top 1.778: 116.99,1.6 118.52,1.6
S$269
  Top 0.61: 39.81,37.88 53.83,37.85 55.11,39.16 77.18,39.13
S$270
  Top 1.778: 111.91,42.37 113.18,42.37
S$271
  Top 0.61: 190.74,65.83 190.74,67.75
S$272
  Top 0.61: 89.06,65.86 89.06,67.47
S$273
  Top 0.61: 28.07,12.03 28.07,11.27 31.91,7.06 43.25,7.06 44.17,8.01 47.95,8.01 47.95,5.81
S$274
  Top 0.61: 134.39,21.64 129.69,26.11 129.69,28.78
S$275
  Top 0.61: 25.55,1.6 25.55,4.34
S$276
  Top 0.61: 30.63,1.6 30.63,4.34
S$278
  Top 1.778: 89.01,70.79 89.01,67.81
S$279
  Top 0.61: 50.51,5.87 50.54,10.66 52.03,12.18
S$280
  Top 0.61: E$80.1 89.05,77.8 89.05,84.79 | 91.59,93.19 91.59,84.79 89.05,84.79 | 66.19,93.14 66.19,84.79 89.05,84.79
  Top 1.778: 91.59,96.22 91.59,93.19 | 66.19,96.22 66.19,93.14
S$281
  Top 0.61: 47.14,82.16 E$75.1 | 47.19,87.35 47.14,83.43
  Top 1.778: 47.14,82.16 47.14,83.43
S$282
  Top 0.61: 10.27,3.22 11.58,4.53 30.7,4.53
S$283
  Top 0.61: 61.11,87.33 52.22,87.33 52.22,83.53 E$73.1
  Top 1.778: 52.22,82.06 52.22,83.53
S$284
  Top 0.61: 55.53,3.95 55.57,1.45 57.3,1.48 59.77,4.56 86.65,4.53
S$285
  Top 0.61: E$70.1 49.68,78.2 49.68,70.5 43.33,70.5 40.16,75.26 39.36,75.26
  Top 1.778: 49.68,79.62 49.68,78.2
S$286
  Top 0.61: 53.04,5.78 53.07,8.62 65.87,8.65 70.93,13.74 76.78,13.74
S$287
  Top 0.61: 54.76,79.47 E$65.1 | 54.76,69.34 54.76,73.56
  Top 1.778: 54.76,79.47 54.76,73.56
S$288
  Top 0.61: 54.76,69.24 E$91.1
S$289
  Top 0.61: E$79.1 52.22,72.8 E$66.1
  Top 1.778: 52.22,79.57 52.22,72.8
S$290
  Top 1.778: 55.68,5.79 55.68,3.38
S$291
  Top 1.778: 53.01,5.79 53.01,3.38
S$292
  Top 1.778: 48.06,5.79 48.06,3.38
S$293
  Top 0.61: 137.31,70.82 137.31,77.8 136.17,78.94 121.44,78.94 120.29,77.8 111.91,77.8 | E$17.1 105.56,87.33 105.56,77.8 111.91,77.8 | 111.91,70.82 111.91,77.8
  Top 1.778: 137.31,70.82 137.31,67.95 | 111.91,70.82 111.91,67.89
S$294
  Top 1.778: 190.64,70.75 190.64,67.78
S$295
  Top 0.61: E$16.1 190.65,77.8 190.65,84.79 | 193.19,93.19 193.19,84.79 190.65,84.79 | 167.79,93.14 167.79,84.79 190.65,84.79
  Top 1.778: 193.19,96.22 193.19,93.19 | 167.79,96.22 167.79,93.14
S$296
  Top 0.61: E$15.1 153.82,72.8 E$3.1
  Top 1.778: 153.82,75.29 153.82,72.8
S$297
  Top 0.61: 135.46,22.58 131.32,26.44 131.98,29.03 132.23,29.67 | 132.23,31.57 132.23,31.5
  Top 1.778: 132.23,31.5 132.23,29.67
S$298
  Top 0.61: E$181.1 125.88,27.13
S$299
  Top 0.61: E$144.1 134.65,29.54
S$300
  Top 0.61: 91.56,16.94 86.47,27.94 66.2,27.94
S$301
  Top 0.61: 49.04,43.15 49.04,41.5 57.06,41.5
S$302
  Top 0.61: 51.6,42.6 55.32,42.63 56.36,44.22 68.41,44.15 70.16,41.45 74.92,41.45 77.62,44.22 82.72,44.22 82.72,43.67
S$303
  Top 0.61: 86.56,44.09 86.62,45.53 54.5,45.53
S$304
  Bottom 1.778: 40.79,16.9 40.79,18.19
S$305
  Top 1.778: 40.79,16.87 40.79,16.9
S$306
  Top 1.778: 117.04,27.08 118.06,27.08
S$307
  Top 1.778: 127.71,27.28 126.64,27.33
S$308
  Top 1.778: 133.86,27.38 133.86,26.62
S$311
  Top 0.61: 107.39,45.68 145.55,45.68 145.55,45.62
S$312
  Top 0.61: 128.48,44.22 143.57,44.22 143.57,44.25 145.49,40.35 148.17,40.38 148.14,43.15
S$313
  Top 0.61: 127.14,35.8 127.14,38.18 128.76,38.24 131.06,40.06 132.9,40.47
S$314
  Top 0.61: 124.64,35.74 124.58,39.1 104.59,39.13
S$315
  Top 0.61: 111.87,18.46 111.87,25.26
S$316
  Top 0.61: 105.87,19.16 105.87,29.07 113.85,29.07 113.85,24.83 119.77,24.89 124.61,29.77
S$317
  Top 0.61: 105.87,12.21 105.87,5.84 146.98,5.78
S$318
  Top 0.61: 129.67,12.03 129.67,11.27 133.51,7.06 144.85,7.06 145.77,8.01 149.55,8.01 149.55,5.81
S$319
  Top 0.61: 152.11,5.87 152.14,10.66 153.63,12.18
S$320
  Top 0.61: 111.87,3.22 111.91,4.53 132.14,4.53 132.09,1.96 132.12,1.53
S$321
  Top 0.61: 157.13,3.95 157.17,1.45 158.9,1.48 161.37,4.56 188.25,4.53
S$322
  Top 0.61: 154.64,5.78 154.67,8.62 167.47,8.65 172.53,13.74 178.38,13.74
S$323
  Top 0.61: 193.16,16.94 188.07,27.94 167.8,27.94
S$324
  Top 0.61: 150.64,43.15 150.64,41.5 158.66,41.5
S$325
  Top 0.61: 153.2,42.6 156.92,42.63 157.96,44.22 170.97,44.15 170.97,41.61 176.05,41.61 178.59,44.22 184.32,44.22 184.32,43.67
S$326
  Top 0.61: 188.16,44.09 188.22,45.53 156.1,45.53
S$327
  Top 0.61: 141.41,37.88 155.43,37.85 156.71,39.16 178.78,39.13
S$328
  cutout Top: 147.17,24.13 145.77,24.1 145.19,25.11 145.92,26.23 145.58,27.45 144.39,28.12 144.39,29.31 145.55,29.89 145.92,31.17 145.19,32.27 145.8,33.3 147.02,33.24 148.05,34.22 147.99,35.47 149,36.05 150,35.38 151.47,35.77 151.98,36.84 153.14,36.84 153.66,35.77 155.12,35.38 156.13,36.02 157.13,35.41 157.07,34.31 158.14,33.18 159.33,33.21 159.91,32.24 159.27,31.26 159.6,29.83 160.67,29.31 160.67,28.12 159.6,27.6 159.21,26.2 159.88,25.14 159.3,24.13 158.02,24.19 157.07,23.28 157.13,21.94 156.1,21.36 155.03,22.06 153.78,21.78 153.14,20.53 151.95,20.53 151.37,21.72 150.19,22.09 149,21.33 147.96,21.94 148.05,23.28
S$329
  Bottom 0.61: 129.81,34.26 129.84,35.87 139.22,40.34
S$330
  Bottom 0.61: 132.27,34.13 133.05,35.76 141.12,38.43
S$331
  Bottom 0.61: 133.66,27.16 127.63,27.32
S$332
  Top 0.61: 115.01,4.52 91.54,4.52
S$333
  Bottom 0.61: 5.28,96.22 5.23,96.22 5.23,87.38
S$334
  Bottom 0.61: 52.27,72.7 58.57,72.7
S$335
  Bottom 0.61: 92.91,77.88 92.86,77.88 92.86,73.97
S$336
  Bottom 0.61: 106.83,96.27 106.88,96.27 106.88,87.27
S$337
  Bottom 0.61: 153.87,72.75 160.17,72.75 160.17,72.64
S$338
  Bottom 0.61: 193.24,77.83 193.24,73.81
S$339
  Top 0.61: 95,99.72 112.12,99.72 112.12,99.67
S$340
  Bottom 0.61: 38.3,87.27 47.24,87.27 47.24,87.38
S$341
  Bottom 0.61: 61.16,87.33 71.88,87.33 71.88,87.38
S$342
  Bottom 0.61: 31.24,75.24 39.21,75.24
S$343
  Bottom 0.61: 58.62,65.63 65.64,65.63 68.64,65.79
S$344
  Bottom 0.61: 160.22,65.68 169.09,65.68 170.36,65.79
S$345
  Bottom 0.61: 162.61,87.33 173.63,87.33
S$346
  Bottom 0.61: 139.85,87.38 148.79,87.38 148.79,87.53
S$347
  Bottom 0.61: 132.89,75.24 142.39,75.24 142.39,75.18
S$348
  pour Bottom (isolate 0.61): 0.63,101.46 97.47,101.45 97.47,61.97 0.63,61.97
S$349
  pour Bottom: 98.89,101.45 196.98,101.45 196.98,101.4 196.99,101.24 196.68,61.97 98.89,61.97
S$350
  pour Bottom: 0.63,47.54 97.47,47.54 97.47,0.81 0.63,0.65
S$351
  pour Bottom: 98.74,47.64 196.68,47.64 197,0.65 98.74,0.81
S$352
  Bottom 1.676: 30.95,1.76 21.74,1.76
S$353
  cutout Bottom: 35.71,33.99 arc-90 38.25,36.53 63.65,36.53 arc-90 66.19,33.99 66.35,23.19 arc-90 64.92,20.33 38.41,20.49 arc-90 35.71,22.56
  cutout Bottom: 137.31,33.99 arc-90 139.85,36.53 165.25,36.53 arc-90 167.79,33.99 167.79,22.4 arc-90 166.52,20.33 139.85,20.33 arc-90 137.31,23.03
S$354
  Top 0.61: 178.87,39.23 179.87,39.73
S$355
  Top 0.61: 77.37,39.23 78.37,39.73
(copper drawn outside any net)
  shapes: Top area x12040, Top circle x2

## Text on the board
temp: DART CONTROLBOARD - M.Marchese - www.DARTMOBO.com